# Altium PCB STM_System_Board.PCBDOC (part 6 of 16)
Units mm, origin at the board's own origin, x right, y up, seen from the top; angles counter-clockwise.
Board outline 222.53 x 100.01 mm, 6 copper layers (Top Layer, Int1 (GND), Int2 (Sign), Layer 1, Layer 2, Bottom Layer), stack 1.526 mm thick; 702 components, 774 nets, 3596 pads, 1988 vias.
Unrouted connection lines stored in the file: 1.
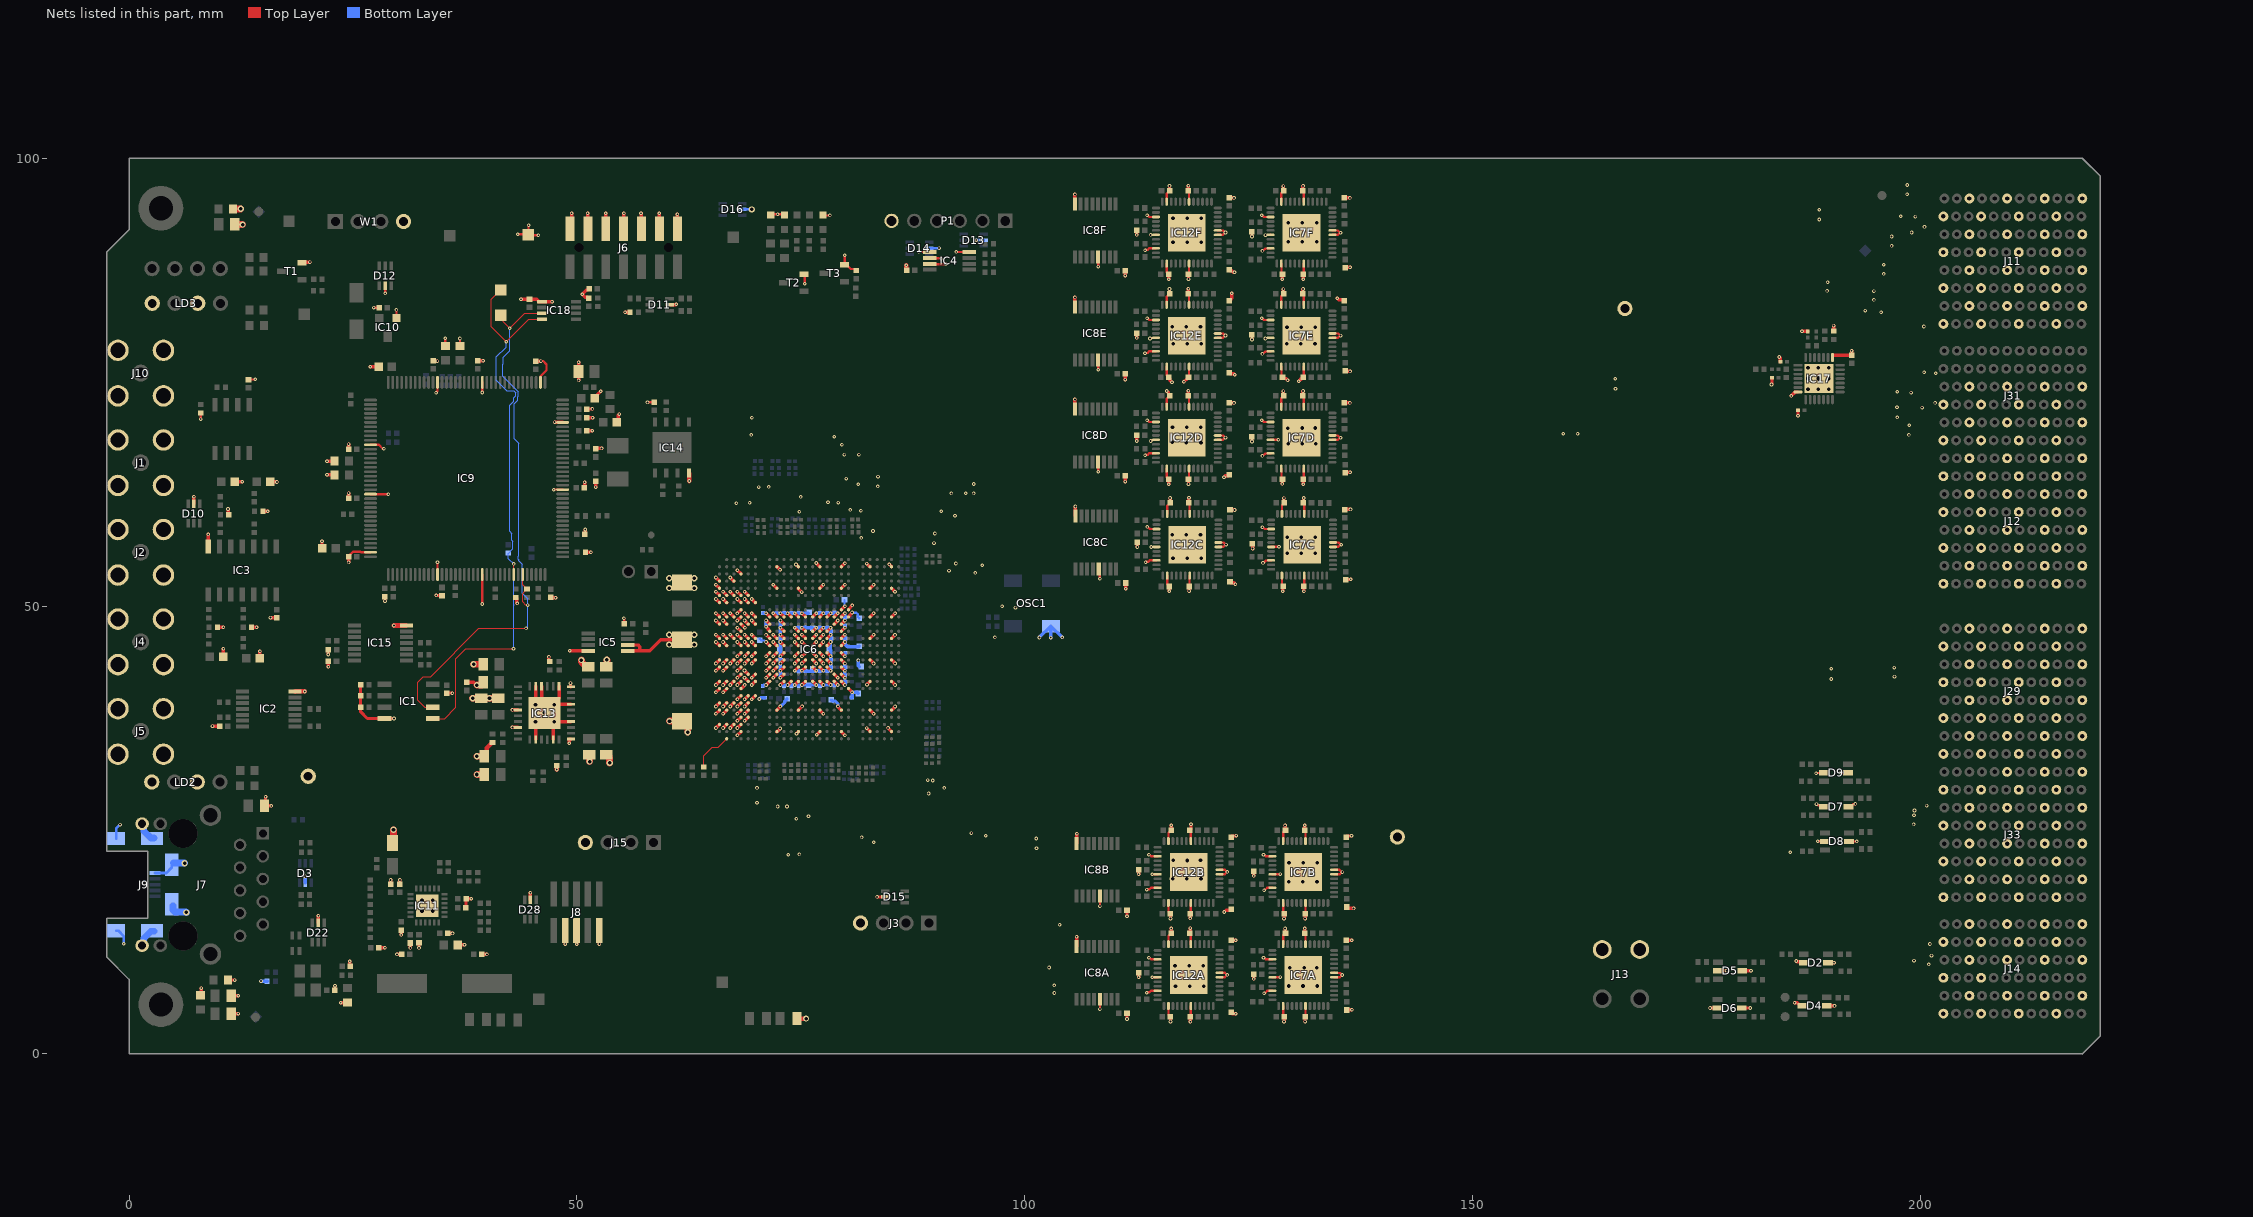
[diagram p9: the nets of this part, all layers, seen from the top]

## Via types
v1: diameter 0.4, hole 0.2, Top Layer to Bottom Layer, tented both sides, 1806 vias
v2: diameter 0.7, hole 0.4, Top Layer to Bottom Layer, tented both sides, 92 vias
v3: diameter 0.7, hole 0.4, Top Layer to Bottom Layer, 90 vias

## Nets (pads, with @x,y where several pads share a name; then routed paths per layer and width w, separated by ;. In a path a pad name is that pad's centre, name@x,y a point inside that pad or via, vN(x,y) a via of type N, cw(c..) or ccw(c..) an arc to the next point about the centre after c; other vN are vias at no path point) (continued)
GND: B2.1 B3.1 B4.1 C1.1 C2.1 C3.1 C4.1 C5.1 C6.1 C7.1 C8A.1 C8B.1 C8C.1 C8D.1 C8E.1 C8F.1 C9A.1 C9B.1 C9C.1 C9D.1 C9E.1 C9F.1 C10.2 C11.2 C12A.1 C12B.1 C12C.1 C12D.1 C12E.1 C12F.1 C13A.1 C13B.1 C13C.1 C13D.1 C13E.1 C13F.1 C14.1 C15.2 C16A.1 C16B.1 C16C.1 C16D.1 C16E.1 C16F.1 C17A.1 C17B.1 C17C.1 C17D.1 C17E.1 C17F.1 C18A.1 C18B.1 C18C.1 C18D.1 C18E.1 C18F.1 C19A.1 C19B.1 C19C.1 C19D.1 C19E.1 C19F.1 C20A.1 C20B.1 C20C.1 C20D.1 C20E.1 C20F.1 C21.1 C22.1 C23.1 C24.2 C25.2 C26.1 C27.1 C28.1 C29.1 C30.1 C31.2 C32.1 C33.1 C34.1 C35.2 C36.1 C37.2 C38.2 C39.1 C40.1 C41.2 C42.1 C43.2 C44.1 C45.1 C46.1 C47.1 C48.1 C49.1 C50.1 C51.1 C52.2 C53.1 C54.1 C55.1 C56.1 C57.2 C58.1 C59.1 C60.1 C61.1 C62.1 C63.1 C64.1 C65.1 C66.1 C67.2 C68.1 C69.1 C70.2 C71.2 C72.2 C73.2 C74.2 C75.1 C76.1 C77.1 C78.1 C79.2 C80.1 C81.1 C82.1 C83.1 C84.1 C85.1 C86.1 C87.1 C88.1 C89.2 C90.1 C91.1 C92.1 C93.1 C94.1 C95.1 C96.1 C97.1 C98.1 C99.1 C100.1 C101.2 C102.2 C103.2 C104.1 C105.1 C106.2 C107.1 C108.1 C109.1 C110.1 C111.1 C112.1 C113.1 C114.1 C115.1 C116.1 C117.1 C118.1 C119.1 C120.1 C121.1 C122.1 C123.1 C124.1 C125.1 C126.1 C127.1 C130.1 C131.1 C132.1 C133.1 C134.1 C135A.1 C135B.1 C135C.1 C135D.1 C135E.1 C135F.1 C136A.1 C136B.1 C136C.1 C136D.1 C136E.1 C136F.1 C137A.1 C137B.1 C137C.1 C137D.1 C137E.1 C137F.1 C138A.1 C138B.1 C138C.1 C138D.1 C138E.1 C138F.1 C139A.1 C139B.1 C139C.1 C139D.1 C139E.1 C139F.1 C140A.1 C140B.1 C140C.1 C140D.1 C140E.1 C140F.1 C141.1 C142.1 C143.1 D2.2 D2.5 D3.2 D4.2 D4.5 D5.2 D5.5 D6.2 D6.5 D7.2 D7.5 D8.2 D8.5 D9.2 D9.5 D10.2 D11.2 D12.2 D13.2 D14.2 D15.2 D16.2 D22.2 D28.2 IC1.4 IC2.7 IC3.7 IC4.4 IC4.5 IC4.6 IC4.7 IC5.4 IC5.5 IC5.6 IC6.AA7 IC6.AA9 IC6.AA10 IC6.AA12 IC6.AA13 IC6.AA14 IC6.AA15 IC6.AA17 IC6.AA18 IC6.AA20 IC6.AB6 IC6.AB7 IC6.AB9 IC6.AB10 IC6.AB12 IC6.AB13 IC6.AB14 IC6.AB15 IC6.AB17 IC6.AB18 IC6.AB20 IC6.AB21 IC6.AB22 IC6.AB23 IC6.AC3 IC6.AC6 IC6.AC7 IC6.AC8 IC6.AC9 IC6.AC10 IC6.AC11 IC6.AC12 IC6.AC13 IC6.AC14 IC6.AC15 IC6.AC16 IC6.AC17 IC6.AC18 IC6.AC19 IC6.AC20 IC6.AC21 IC6.AC22 IC6.AC23 IC6.AC24 IC6.AC25 IC6.AD4 IC6.AD6 IC6.AD9 IC6.AD12 IC6.AD15 IC6.AD18 IC6.AD21 IC6.AD24 IC6.AE6 IC6.AE7 IC6.AE9 IC6.AE10 IC6.AE12 IC6.AE13 IC6.AE15 IC6.AE16 IC6.AE18 IC6.AE19 IC6.AE21 IC6.AE22 IC6.AE24 IC6.AF4 IC6.AF5 IC6.AF6 IC6.AF7 IC6.AF9 IC6.AF10 IC6.AF12 IC6.AF13 IC6.AF15 IC6.AF16 IC6.AF18 IC6.AF19 IC6.AF21 IC6.AF22 IC6.AF24 IC6.B2 IC6.B5 IC6.B9 IC6.B12 IC6.B15 IC6.B18 IC6.B22 IC6.B25 IC6.E2 IC6.E5 IC6.E9 IC6.E12 IC6.E15 IC6.E18 IC6.E22 IC6.E25 IC6.H8 IC6.H9 IC6.H19 IC6.J2 IC6.J5 IC6.J8 IC6.J9 IC6.J10 IC6.J11 IC6.J12 IC6.J13 IC6.J14 IC6.J15 IC6.J16 IC6.J17 IC6.J18 IC6.J22 IC6.J25 IC6.K9 IC6.K10 IC6.K17 IC6.K18 IC6.L9 IC6.L11 IC6.L12 IC6.L13 IC6.L14 IC6.L15 IC6.L16 IC6.L18 IC6.M2 IC6.M5 IC6.M9 IC6.M11 IC6.M12 IC6.M13 IC6.M14 IC6.M15 IC6.M16 IC6.M18 IC6.M22 IC6.M25 IC6.N9 IC6.N11 IC6.N12 IC6.N13 IC6.N14 IC6.N15 IC6.N16 IC6.N18 IC6.P9 IC6.P11 IC6.P12 IC6.P13 IC6.P14 IC6.P15 IC6.P16 IC6.P18 IC6.R2 IC6.R5 IC6.R9 IC6.R11 IC6.R12 IC6.R13 IC6.R14 IC6.R15 IC6.R16 IC6.R18 IC6.R22 IC6.R25 IC6.T9 IC6.T18 IC6.U9 IC6.U10 IC6.U11 IC6.U12 IC6.U13 IC6.U14 IC6.U15 IC6.U16 IC6.U17 IC6.U18 IC6.V2 IC6.V5 IC6.V9 IC6.V12 IC6.V13 IC6.V14 IC6.V15 IC6.V16 IC6.V17 IC6.V22 IC6.V25 IC6.W9 IC6.W10 IC6.W11 IC6.W12 IC6.W13 IC6.W14 IC6.W15 IC6.W16 IC6.W17 IC6.W18 IC7A.6 IC7A.7 IC7A.18 IC7A.23 IC7A.27 IC7A.31 IC7A.34 IC7A.38 IC7A.43 IC7A.49 IC7B.6 IC7B.7 IC7B.18 IC7B.23 IC7B.27 IC7B.31 IC7B.34 IC7B.38 IC7B.43 IC7B.49 IC7C.6 IC7C.7 IC7C.18 IC7C.23 IC7C.27 IC7C.31 IC7C.34 IC7C.38 IC7C.43 IC7C.49 IC7D.6 IC7D.7 IC7D.18 IC7D.23 IC7D.27 IC7D.31 IC7D.34 IC7D.38 IC7D.43 IC7D.49 IC7E.6 IC7E.7 IC7E.18 IC7E.23 IC7E.27 IC7E.31 IC7E.34 IC7E.38 IC7E.43 IC7E.49 IC7F.6 IC7F.7 IC7F.18 IC7F.23 IC7F.27 IC7F.31 IC7F.34 IC7F.38 IC7F.43 IC7F.49 IC8A.8 IC8A.13 IC8B.8 IC8B.13 IC8C.8 IC8C.13 IC8D.8 IC8D.13 IC8E.8 IC8E.13 IC8F.8 IC8F.13 IC9.16 IC9.31 IC9.38 IC9.51 IC9.61 IC9.83 IC9.94 IC9.107 IC9.120 IC9.130 IC10.1 IC11.25 IC12A.6 IC12A.7 IC12A.18 IC12A.23 IC12A.27 IC12A.31 IC12A.34 IC12A.38 IC12A.43 IC12A.49 IC12B.6 IC12B.7 IC12B.18 IC12B.23 IC12B.27 IC12B.31 IC12B.34 IC12B.38 IC12B.43 IC12B.49 IC12C.6 IC12C.7 IC12C.18 IC12C.23 IC12C.27 IC12C.31 IC12C.34 IC12C.38 IC12C.43 IC12C.49 IC12D.6 IC12D.7 IC12D.18 IC12D.23 IC12D.27 IC12D.31 IC12D.34 IC12D.38 IC12D.43 IC12D.49 IC12E.6 IC12E.7 IC12E.18 IC12E.23 IC12E.27 IC12E.31 IC12E.34 IC12E.38 IC12E.43 IC12E.49 IC12F.6 IC12F.7 IC12F.18 IC12F.23 IC12F.27 IC12F.31 IC12F.34 IC12F.38 IC12F.43 IC12F.49 IC13.2 IC13.5 IC13.7 IC13.10 IC13.13 IC13.16 IC13.17 IC13.20 IC13.21 IC13.27 IC13.30 IC13.33 IC14.4 IC15.7 IC17.1 IC17.14 IC17.29 IC18.1 J1.2 J2.2 J3.4 J4.2 J5.2 J6.1 J6.3 J6.5 J6.7 J6.9 J6.11 J6.13 J7.L2 J7.L4 J8.3 J8.5 J8.9 J9.5 J9.6 J9.7 J9.8 J9.9 J9.10 J9.11 J10.2 J11.A2 J11.A4 J11.A6 J11.A8 J11.C1 J11.C3 J11.C5 J11.C7 J11.D2 J11.D4 J11.D6 J11.D8 J11.F1 J11.F3 J11.F5 J11.F7 J11.G2 J11.G4 J11.G6 J11.G8 J11.I1 J11.I3 J11.I5 J11.I7 J11.J2 J11.J4 J11.J6 J11.J8 J11.L1 J11.L3 J11.L5 J11.L7 J12.A2 J12.A4 J12.A6 J12.A8 J12.C1 J12.C3 J12.C5 J12.C7 J12.D2 J12.D4 J12.D6 J12.D8 J12.F1 J12.F3 J12.F5 J12.F7 J12.G2 J12.G4 J12.G6 J12.G8 J12.I1 J12.I3 J12.I5 J12.I7 J12.J2 J12.J4 J12.J6 J12.J8 J12.L1 J12.L3 J12.L5 J12.L7 J13.1 J13.2 J14.A2 J14.A4 J14.A6 J14.C1 J14.C5 J14.D2 J14.D4 J14.D6 J14.F1 J14.F5 J14.G2 J14.G4 J14.G6 J14.I1 J14.I3 J14.I5 J14.J2 J14.J4 J14.J6 J14.L1 J14.L3 J14.L5 J15.4 J29.A2 J29.A4 J29.A6 J29.A8 J29.C1 J29.C3 J29.C5 J29.C7 J29.D2 J29.D4 J29.D6 J29.D8 J29.F1 J29.F3 J29.F5 J29.F7 J29.G2 J29.G4 J29.G6 J29.G8 J29.I1 J29.I3 J29.I5 J29.I7 J29.J2 J29.J4 J29.J6 J29.J8 J29.L1 J29.L3 J29.L5 J29.L7 J31.A2 J31.A4 J31.C1 J31.C3 J31.D2 J31.D4 J31.F1 J31.F3 J31.G2 J31.G4 J31.I1 J31.I3 J31.J2 J31.J4 J31.L1 J31.L3 J33.A2 J33.A4 J33.A6 J33.A8 J33.C1 J33.C3 J33.C5 J33.C7 J33.D2 J33.D4 J33.D6 J33.D8 J33.F1 J33.F3 J33.F5 J33.F7 J33.G2 J33.G4 J33.G6 J33.G8 J33.I1 J33.I3 J33.I5 J33.I7 J33.J2 J33.J4 J33.J6 J33.L1 J33.L3 J33.L5 J33.L7 LD2.1 LD2.3 LD3.1 LD3.3 LD4.1 LD5.1 LD8.1 OSC1.2 P1.6 R3.1 R4.1 R10.2 R20.2 R30.1 R47.2 R49.2 R55.2 R73.2 R96.2 R135.1 R180.2 R181.2 R182.2 R183.2 R198.1 R200.2 R203.2 R214.1 R227.2 R228.2 R231.2 R233.2 R235.2 R238.1 R244.1 R284.1 R285.1 R286.1 R288.2 T1.2 T2.2 T3.2 TP7.1 W1.4 | length 567.3
  Top Layer w0.127: IC6.H9@80.315,48.784 IC6.H9@80.315,48.83 ; v1@80.715,49.23 v1(80.715,49.275)
  Top Layer w0.254: R238.1@7.994,71.545 7.997,71.542 7.997,70.87 v1(8.001,70.866) ; C46.1@13.335,75.253 13.364,75.282 14.068,75.282 v1(14.097,75.311) ; C57.2@24.51,55.496 24.51,55.576 24.994,56.06 25.825,56.06 25.889,55.996 IC9.107@26.96,55.996 ; IC9.94@26.96,62.496 26.973,62.484 v1(28.956,62.484) ; IC9.83@26.96,67.996 27.889,67.996 28.321,67.564 v1(28.448,67.564) ; v1(27.305,83.312) 27.316,83.301 27.932,83.301 C67.2@27.942,83.291 ; IC10.1@29.842,82.143 29.845,82.146 v1(29.845,83.058) ; v1(34.275,73.8) 34.275,73.84 34.435,74 IC9.61@34.435,74.971 ; IC9.120@34.435,53.521 v1(34.435,54.882) ; R181.2@35.306,79.032 v1(35.306,79.883) ; R180.2@36.935,79.032 v1(36.935,79.861) ; v1(39.435,50.227) IC9.130@39.435,53.521 ; v1(39.435,73.835) IC9.51@39.435,74.971 ; v1(43.4,91.5) 44.517,91.5 TP7.1@44.577,91.44 ; v1(44.6,92.5) 44.6,91.463 TP7.1@44.577,91.44 ; v1(45.7,91.4) 44.617,91.4 TP7.1@44.577,91.44 ; IC9.38@45.935,74.971 45.935,75.653 46.609,76.327 46.609,76.962 46.228,77.343 v1(45.974,77.343) ; v1(47.4,62.975) 47.421,62.996 IC9.16@48.41,62.996 ; v1(55.245,48.641) 55.273,48.613 55.273,48.036 C40.1@55.303,48.006 ; v1(57.875,72.725) 57.9,72.75 C45.1@58.65,72.75 ; LD5.1@71.628,93.662 71.692,93.726 v1(72.39,93.726) 73.088,93.726 LD8.1@73.152,93.662 ; T2.2@75.325,87.056 75.438,86.943 v1(75.438,85.979) ; LD4.1@77.47,93.662 77.533,93.599 v1(78.232,93.599) ; v1(79.883,89.154) 79.883,88.111 T3.2@79.88,88.108 80.08,88.108 80.56,87.628 80.99,87.628 R214.1@81.153,87.465 ; v1(88.138,89.535) 88.159,89.514 89.346,89.514 IC4.5@89.367,89.494 ; IC4.7@89.367,88.194 89.419,88.142 91.153,88.142 v1(91.186,88.175) ; IC4.6@89.367,88.844 89.403,88.808 90.643,88.808 v1(90.678,88.773) ; v1(92.331,89.533) 92.35,89.514 93.747,89.514 IC4.4@93.767,89.494 ; v1(108.179,65) IC8D.13@108.179,66.094 ; v1(108.179,76.385) IC8E.13@108.179,77.479 ; v1(108.179,87.893) IC8F.13@108.179,88.979 ; IC8C.13@108.244,54.146 108.342,54.048 108.342,53.125 108.375,53.092 v1(108.375,53.052) ; v1(108.375,5.012) IC8A.13@108.375,6.106 ; v1(108.375,16.501) IC8B.13@108.375,17.606 ; v1(113.412,78.212) 113.44,78.24 113.683,78.24 113.873,78.429 IC12E.34@114.629,78.429 ; v1(113.414,66.829) 113.461,66.876 113.705,66.876 113.873,67.044 IC12D.34@114.629,67.044 ; v1(113.414,89.714) 113.461,89.761 113.705,89.761 113.873,89.929 IC12F.34@114.629,89.929 ; v1(113.479,54.881) 113.526,54.928 113.77,54.928 113.938,55.096 IC12C.34@114.694,55.096 ; v1(113.61,6.841) 113.657,6.888 113.901,6.888 114.069,7.056 IC12A.34@114.825,7.056 ; v1(113.61,18.341) 113.657,18.388 113.901,18.388 114.069,18.556 IC12B.34@114.825,18.556 ; v1(113.644,70.732) 113.711,70.732 113.898,70.544 IC12D.27@114.629,70.544 ; v1(113.644,82.117) 113.711,82.117 113.898,81.929 IC12E.27@114.629,81.929 ; v1(113.644,93.617) 113.711,93.617 113.898,93.429 IC12F.27@114.629,93.429 ; v1(113.656,58.836) 113.696,58.836 113.872,58.66 113.899,58.66 113.963,58.596 IC12C.27@114.694,58.596 ; v1(113.84,10.744) 113.907,10.744 114.094,10.556 IC12A.27@114.825,10.556 ; v1(113.84,22.244) 113.907,22.244 114.094,22.056 IC12B.27@114.825,22.056 ; v1(113.969,79.865) 114.008,79.865 114.064,79.921 114.62,79.921 IC12E.31@114.629,79.929 ; v1(114.03,68.425) 114.069,68.425 114.18,68.536 114.62,68.536 IC12D.31@114.629,68.544 ; v1(114.03,91.425) 114.032,91.427 114.627,91.427 IC12F.31@114.629,91.429 ; v1(114.095,56.592) 114.097,56.594 114.692,56.594 IC12C.31@114.694,56.596 ; v1(114.226,8.552) 114.228,8.554 114.823,8.554 IC12A.31@114.825,8.556 ; v1(114.226,20.052) 114.228,20.054 114.823,20.054 IC12B.31@114.825,20.056 ; IC12D.38@115.829,65.344 115.829,64.354 C135D.1@116.054,64.129 ; IC12D.23@115.829,72.244 115.829,73.154 116.14,73.464 C20D.1@116.144,73.464 ; IC12E.38@115.829,76.729 115.829,75.738 C135E.1@116.054,75.513 ; IC12E.23@115.829,83.629 115.829,84.539 116.14,84.849 C20E.1@116.144,84.849 ; IC12F.38@115.829,88.229 115.829,87.238 C135F.1@116.054,87.013 ; IC12F.23@115.829,95.129 115.829,96.039 116.14,96.349 C20F.1@116.144,96.349 ; IC12C.38@115.894,53.396 115.894,52.405 C135C.1@116.119,52.18 ; IC12C.23@115.894,60.296 115.894,61.206 116.204,61.516 C20C.1@116.209,61.516 ; IC12A.38@116.025,5.356 116.025,4.366 C135A.1@116.25,4.141 ; IC12A.23@116.025,12.256 116.025,13.166 116.336,13.476 C20A.1@116.34,13.476 ; IC12B.38@116.025,16.856 116.025,15.866 C135B.1@116.25,15.641 ; IC12B.23@116.025,23.756 116.025,24.666 116.336,24.976 C20B.1@116.34,24.976 ; C19D.1@118.243,73.489 118.32,73.413 118.32,72.253 IC12D.18@118.329,72.244 ; C19E.1@118.243,84.874 118.32,84.798 118.32,83.638 IC12E.18@118.329,83.629 ; C19F.1@118.243,96.374 118.32,96.298 118.32,95.138 IC12F.18@118.329,95.129 ; C18D.1@118.263,64.129 118.32,64.186 118.32,65.336 IC12D.43@118.329,65.344 ; C18E.1@118.263,75.513 118.32,75.571 118.32,76.721 IC12E.43@118.329,76.729 ; C18F.1@118.263,87.013 118.32,87.071 118.32,88.221 IC12F.43@118.329,88.229 ; C19C.1@118.308,61.541 118.385,61.464 118.385,60.305 IC12C.18@118.394,60.296 ; C18C.1@118.328,52.18 118.385,52.238 118.385,53.388 IC12C.43@118.394,53.396 ; C19A.1@118.439,13.501 118.516,13.425 118.516,12.265 IC12A.18@118.525,12.256 ; C19B.1@118.439,25.001 118.516,24.925 118.516,23.765 IC12B.18@118.525,23.756 ; C18A.1@118.459,4.141 118.516,4.198 118.516,5.348 IC12A.43@118.525,5.356 ; C18B.1@118.459,15.641 118.516,15.698 118.516,16.848 IC12B.43@118.525,16.856 ; IC12D.6@121.529,68.544 121.538,68.553 122.106,68.553 v1@122.362,68.809 ; IC12D.7@121.529,69.044 122.11,69.044 122.352,68.802 v1(122.392,68.802) ; IC12E.6@121.529,79.929 121.538,79.938 122.106,79.938 122.362,80.194 v1(122.392,80.194) 122.342,80.194 122.106,80.429 IC12E.7@121.529,80.429 ; IC12F.6@121.529,91.429 121.538,91.438 122.106,91.438 122.362,91.694 v1(122.392,91.694) 122.342,91.694 122.106,91.929 IC12F.7@121.529,91.929 ; IC12C.6@121.594,56.596 121.603,56.605 122.171,56.605 122.427,56.861 v1(122.457,56.861) 122.407,56.861 122.171,57.096 IC12C.7@121.594,57.096 ; IC12A.6@121.725,8.556 121.734,8.565 122.302,8.565 122.558,8.821 v1(122.588,8.821) 122.538,8.821 122.302,9.056 IC12A.7@121.725,9.056 ; IC12B.6@121.725,20.056 121.734,20.065 122.302,20.065 122.558,20.321 v1(122.588,20.321) 122.538,20.321 122.302,20.556 IC12B.7@121.725,20.556 ; v1(126.444,70.732) 126.511,70.732 126.698,70.544 IC7D.27@127.429,70.544 ; v1(126.444,82.117) 126.511,82.117 126.698,81.929 IC7E.27@127.429,81.929 ; v1(126.444,93.631) 126.483,93.631 126.685,93.429 IC7F.27@127.429,93.429 ; v1(126.509,58.784) 126.576,58.784 126.763,58.596 IC7C.27@127.494,58.596 ; v1(126.511,66.756) 126.56,66.804 126.619,66.804 126.85,67.036 127.42,67.036 IC7D.34@127.429,67.044 ; v1(126.511,78.141) 126.56,78.189 126.619,78.189 126.85,78.421 127.42,78.421 IC7E.34@127.429,78.429 ; v1(126.511,89.641) 126.56,89.689 126.619,89.689 126.85,89.921 127.42,89.921 IC7F.34@127.429,89.929 ; v1(126.576,54.808) 126.625,54.856 126.684,54.856 126.915,55.088 127.485,55.088 IC7C.34@127.494,55.096 ; v1(126.64,10.744) 126.707,10.744 126.894,10.556 IC7A.27@127.625,10.556 ; v1(126.64,22.244) 126.707,22.244 126.894,22.056 IC7B.27@127.625,22.056 ; v1(126.708,6.768) 126.756,6.816 126.815,6.816 127.046,7.048 127.616,7.048 IC7A.34@127.625,7.056 ; v1(126.708,18.268) 126.756,18.316 126.815,18.316 127.046,18.548 127.616,18.548 IC7B.34@127.625,18.556 ; v1(126.848,79.863) 126.888,79.863 126.945,79.921 127.42,79.921 IC7E.31@127.429,79.929 ; v1(126.86,91.407) 126.873,91.421 127.42,91.421 IC7F.31@127.429,91.429 ; IC7D.31@127.429,68.544 127.438,68.553 128.295,68.553 v1(128.305,68.564) ; IC7C.31@127.494,56.596 127.503,56.605 128.36,56.605 v1(128.37,56.616) ; IC7A.31@127.625,8.556 127.634,8.565 128.491,8.565 v1(128.501,8.576) ; IC7B.31@127.625,20.056 127.634,20.065 128.491,20.065 v1(128.501,20.076) ; IC7D.38@128.629,65.344 128.638,65.336 128.638,64.25 C140D.1@128.754,64.134 ; IC7D.23@128.629,72.244 128.629,73.204 128.854,73.429 C9D.1@128.854,73.452 ; IC7E.38@128.629,76.729 128.638,76.721 128.638,75.635 C140E.1@128.754,75.519 ; IC7E.23@128.629,83.629 128.629,84.589 128.854,84.814 C9E.1@128.854,84.837 ; IC7F.38@128.629,88.229 128.638,88.221 128.638,87.135 C140F.1@128.754,87.019 ; IC7F.23@128.629,95.129 128.629,96.089 128.854,96.314 C9F.1@128.854,96.337 ; IC7C.38@128.694,53.396 128.703,53.388 128.703,52.302 C140C.1@128.819,52.186 ; IC7C.23@128.694,60.296 128.694,61.256 128.919,61.481 C9C.1@128.919,61.504 ; IC7A.38@128.825,5.356 128.834,5.348 128.834,4.262 C140A.1@128.95,4.146 ; IC7A.23@128.825,12.256 128.825,13.216 129.05,13.441 C9A.1@129.05,13.464 ; IC7B.38@128.825,16.856 128.834,16.848 128.834,15.762 C140B.1@128.95,15.646 ; IC7B.23@128.825,23.756 128.825,24.716 129.05,24.941 C9B.1@129.05,24.964 ; C12D.1@131.04,73.464 131.12,73.384 131.12,72.253 IC7D.18@131.129,72.244 ; C12E.1@131.04,84.849 131.12,84.769 131.12,83.638 IC7E.18@131.129,83.629 ; C12F.1@131.04,96.349 131.12,96.269 131.12,95.138 IC7F.18@131.129,95.129 ; C13D.1@131.077,64.143 131.12,64.187 131.12,65.336 IC7D.43@131.129,65.344 ; C13E.1@131.077,75.528 131.12,75.572 131.12,76.721 IC7E.43@131.129,76.729 ; C13F.1@131.077,87.028 131.12,87.072 131.12,88.221 IC7F.43@131.129,88.229 ; C12C.1@131.105,61.516 131.185,61.436 131.185,60.305 IC7C.18@131.194,60.296 ; C13C.1@131.142,52.195 131.185,52.239 131.185,53.388 IC7C.43@131.194,53.396 ; C12A.1@131.236,13.476 131.316,13.396 131.316,12.265 IC7A.18@131.325,12.256 ; C12B.1@131.236,24.976 131.316,24.896 131.316,23.765 IC7B.18@131.325,23.756 ; C13A.1@131.273,4.155 131.316,4.199 131.316,5.348 IC7A.43@131.325,5.356 ; C13B.1@131.273,15.655 131.316,15.699 131.316,16.848 IC7B.43@131.325,16.856 ; IC7D.6@134.329,68.544 134.338,68.553 134.942,68.553 v1@135.178,68.79 ; IC7D.7@134.329,69.044 134.338,69.036 134.933,69.036 v1@135.178,68.79 ; IC7E.6@134.329,79.929 134.338,79.938 134.942,79.938 v1@135.178,80.175 ; IC7E.7@134.329,80.429 134.338,80.421 134.969,80.421 135.205,80.185 v1(135.245,80.185) ; IC7F.6@134.329,91.429 134.338,91.438 134.942,91.438 v1@135.178,91.675 ; IC7F.7@134.329,91.929 134.338,91.921 134.933,91.921 v1@135.178,91.675 ; IC7C.6@134.394,56.596 134.403,56.605 135.007,56.605 v1@135.243,56.842 ; IC7C.7@134.394,57.096 134.403,57.088 134.998,57.088 v1@135.243,56.842 ; IC7A.6@134.525,8.556 134.534,8.565 135.138,8.565 v1@135.374,8.802 ; IC7A.7@134.525,9.056 134.534,9.048 135.161,9.048 135.392,8.817 v1(135.432,8.817) ; IC7B.6@134.525,20.056 134.534,20.065 135.138,20.065 v1@135.374,20.302 ; IC7B.7@134.525,20.556 134.534,20.548 135.129,20.548 v1@135.374,20.302 ; v1(135.245,68.79) v1@135.178,68.79 ; v1(135.245,91.675) v1@135.178,91.675 ; v1(135.31,56.842) v1@135.243,56.842 ; v1(135.441,20.302) v1@135.374,20.302 ; v1(188.316,31.344) 188.334,31.362 189.18,31.362 D9.2@189.199,31.381 ; v1(188.366,27.889) 188.406,27.889 188.542,27.753 189.046,27.753 D7.5@189.219,27.58 ; v1(188.493,23.749) 188.508,23.734 189.283,23.734 D8.2@189.298,23.72 ; v1(191.008,31.394) 191.015,31.388 191.892,31.388 D9.5@191.899,31.381 ; D7.2@191.919,27.58 192.169,27.58 192.475,27.887 192.682,27.887 v1(192.71,27.915) ; D8.5@191.998,23.72 D8.5@191.998,23.72 192.86,23.722 v1(192.862,23.724)
  Top Layer w0.3: v1(28.6,84.9) D12.2@28.6,85.775 ; v1(83.5,17.525) D15.2@84.4,17.525
  Top Layer w0.35: R286.1@25.855,41.225 R285.1@25.855,39.962 R284.1@25.855,38.7 25.855,38.195 26.605,37.445 IC1.4@28.5,37.445 v1(29.58,37.445) ; C1.1@35.45,40.275 v1(36.1,40.275)
  Top Layer w0.381: D10.2@7.239,61.425 v1(7.239,62.192) ; R4.1@8,6.55 8.05,6.6 v1(8.05,7.35) ; IC3.7@8.831,56.666 v1(8.831,57.996) ; v1(9.316,36.601) C5.1@10.124,36.601 ; R200.2@9.868,47.625 v1(10.529,47.625) ; C3.1@10.529,44.323 v1(10.529,45.226) ; v1(11.049,60.833) 11.053,60.829 11.053,60.283 R10.2@11.138,60.198 ; R135.1@11.05,8.25 v1(11.806,8.25) ; C11.2@11.4,4.5 v1(12.196,4.5) ; C103.2@11.4,6.491 v1(12.196,6.491) ; C2.1@11.799,63.881 v1(12.641,63.881) ; R203.2@13.678,47.625 v1(14.236,47.625) ; C4.1@14.593,44.196 14.601,44.204 14.601,44.954 v1(14.605,44.958) ; R20.2@14.948,60.579 v1(15.494,60.579) ; v1(15.24,28.702) 15.236,28.698 15.236,27.798 C102.2@15.124,27.686 v1(15.875,27.686) ; C7.1@15.736,63.881 15.767,63.85 16.506,63.85 v1(16.51,63.846) ; v1(15.79,48.705) 15.793,48.702 16.507,48.702 C6.1@16.51,48.699 ; T1.2@19.311,88.326 19.373,88.388 20.189,88.388 v1(20.193,88.392) ; D22.2@21.122,14.645 21.129,14.652 21.129,15.414 v1(21.133,15.418) ; v1(21.539,57.226) 21.543,57.223 21.543,56.485 C24.2@21.574,56.453 ; v1(22.098,64.643) R183.2@22.949,64.643 ; v1(22.098,66.167) R182.2@22.949,66.167 ; v1(22.239,44.591) R228.2@22.239,45.114 ; v1(22.259,43.214) C44.1@22.259,43.844 ; C108.1@22.987,7.112 v1(22.987,7.62) ; v1(23.622,5.715) 23.626,5.719 24.353,5.719 R73.2@24.384,5.75 ; v1(24.511,54.864) C57.2@24.51,55.496 ; C74.2@24.51,62.044 v1(24.511,62.611) ; C73.2@24.51,67.497 v1(24.511,68.072) ; v1(24.643,10.343) 24.647,10.339 24.647,9.839 C109.1@24.707,9.779 ; v1(26.924,76.708) 26.928,76.704 27.843,76.704 C25.2@27.851,76.696 ; C80.1@27.859,11.865 v1(28.566,11.865) ; R30.1@28.551,51.035 28.571,51.015 28.571,50.55 v1(28.575,50.546) ; C79.2@29.197,18.951 v1(29.197,19.426) ; v1(29.909,11.115) C82.1@30.459,11.115 ; C85.1@30.233,18.951 v1(30.233,19.426) ; v1(30.384,13.287) R49.2@30.384,13.814 ; C88.1@31.383,12.387 31.405,12.365 31.405,11.841 v1(31.409,11.837) ; C81.1@32.366,12.391 32.365,12.39 v1(32.364,11.836) ; C35.2@33.935,77.395 33.983,77.347 34.413,77.347 v1(34.417,77.343) ; v1(34.29,51.181) 34.294,51.177 34.925,51.177 C70.2@34.933,51.169 ; C83.1@35.595,13.472 35.605,13.461 36.101,13.461 v1(36.105,13.457) ; C87.1@36.709,12.161 36.73,12.182 37.444,12.182 v1(37.447,12.186) ; C84.1@37.599,16.311 37.615,16.327 37.615,17.298 R47.2@37.632,17.314 v1(38.193,17.314) ; C39.1@37.719,41.471 38.466,41.471 38.764,41.173 v2(38.837,41.173) ; C37.2@38.916,77.375 v1(39.525,77.375) ; C91.1@39.359,11.115 v1(39.953,11.115) ; v1(42.79,36.449) IC13.30@43.409,36.45 ; v1(42.79,38.407) 42.793,38.404 43.405,38.404 IC13.27@43.409,38.4 ; R96.2@43.174,50.949 43.194,50.949 43.293,50.85 43.293,50.329 43.326,50.297 v1(43.326,50.292) ; v1(43.75,84.25) C143.1@44.7,84.25 45.517,84.25 45.741,84.027 45.741,83.984 45.75,83.975 IC18.1@46.1,83.975 v1(47.225,83.975) ; D28.2@44.8,17.21 v1(44.8,18.003) ; IC13.2@45.389,35.112 45.389,37.092 IC13.33@46.372,38.075 ; IC13.21@45.389,41.037 45.389,39.058 IC13.33@46.047,38.4 ; C71.2@45.406,77.344 v1(45.974,77.343) ; IC13.20@46.047,41.037 IC13.33@46.047,38.4 ; v1(46.863,44.323) 46.867,44.319 46.867,43.877 R233.2@46.946,43.798 ; C72.2@47.05,50.964 47.083,50.931 47.612,50.931 v1(47.616,50.927) ; IC13.5@47.355,35.112 47.355,37.092 IC13.33@47.347,37.1 ; v1(47.507,70.526) 47.511,70.523 48.384,70.523 IC9.31@48.41,70.496 ; IC13.17@48.005,41.037 48.005,39.708 IC13.33@47.347,39.05 ; v1(48.695,12.265) J8.3@48.695,13.854 ; v1(49.149,34.671) 49.153,34.675 49.153,35.109 49.193,35.15 IC13.7@49.334,35.15 ; v1(49.197,44.999) IC5.4@51.267,44.999 ; J6.13@49.213,92.132 49.399,92.319 49.399,93.849 v1(49.403,93.853) ; v1(49.276,41.402) 49.28,41.398 49.28,41.04 49.32,41 IC13.16@49.334,41 ; IC13.10@49.334,37.1 IC13.33@47.347,37.1 ; IC13.13@49.334,39.05 IC13.33@47.347,39.05 ; v1(49.965,12.246) J8.5@49.965,13.854 ; v1(50.184,75.184) 50.18,75.188 50.18,76.174 C78.1@50.154,76.2 50.18,76.226 50.18,77.212 v1(50.184,77.216) ; C38.2@50.825,63.2 50.846,63.221 50.846,63.821 v1(50.85,63.825) ; C43.2@50.885,57.996 50.923,58.034 50.923,58.543 v1(50.927,58.547) ; R198.1@50.952,56.002 50.954,56.005 51.56,56.005 v1(51.562,56.007) ; C41.2@51.075,69.575 v1(51.7,69.575) ; C31.2@51.075,71 51.09,71.015 51.735,71.015 51.745,71.025 v1(51.75,71.025) ; C15.2@51.075,71.95 51.115,71.99 51.71,71.99 51.72,72 v1(51.725,72) ; v1(51.181,93.853) 51.185,93.849 51.185,92.161 J6.11@51.213,92.132 ; C142.1@51.3,84.35 51.18,84.469 50.931,84.469 v1(50.6,84.8) 51.08,85.281 51.231,85.281 C141.1@51.35,85.4 ; C107.1@51.975,73.175 52.26,73.46 52.26,73.585 v1(52.65,73.975) ; C21.1@52.089,63.923 52.097,63.915 52.097,63.281 v1(52.101,63.277) ; C23.1@52.114,67.535 52.169,67.59 52.734,67.59 52.745,67.6 v1(52.75,67.6) ; v1(52.505,12.265) J8.9@52.505,13.854 ; J6.9@53.213,92.132 v1(53.213,93.853) ; C14.1@54.425,70.5 54.617,70.692 54.617,71.312 54.725,71.42 v1(54.725,71.425) ; J6.7@55.213,92.132 55.241,92.161 55.241,93.849 v1(55.245,93.853) ; v1(55.372,82.804) R227.2@55.918,82.804 ; IC5.5@55.667,44.999 57.023,44.999 ; IC5.6@55.667,45.649 56.84,45.649 57.023,45.466 57.023,44.999 ; v1(57.15,93.853) 57.154,93.849 57.154,92.192 J6.5@57.213,92.132 ; v1(59.182,93.853) 59.186,93.849 59.186,92.16 J6.3@59.213,92.132 ; D11.2@60.329,83.632 60.339,83.641 61.03,83.641 61.082,83.693 v1(61.087,83.693) ; J6.1@61.213,92.132 v1(61.214,93.726) ; C106.2@61.715,46.234 59.366,46.234 58.131,44.999 57.023,44.999 ; v1(65.515,36.384) IC6.AF24@65.915,36.784 ; v1(65.515,37.984) IC6.AF22@65.915,38.384 ; v1(65.515,38.784) IC6.AF21@65.915,39.184 ; v1(65.515,40.384) IC6.AF19@65.915,40.784 ; v1(65.515,41.184) IC6.AF18@65.915,41.584 ; v1(65.515,42.784) IC6.AF16@65.915,43.184 ; v1(65.515,43.584) IC6.AF15@65.915,43.984 ; v1(65.515,45.984) IC6.AF13@65.915,45.584 ; v1(65.515,46.784) IC6.AF12@65.915,46.384 ; v1(65.515,48.384) IC6.AF10@65.915,47.984 ; v1(65.515,49.184) IC6.AF9@65.915,48.784 ; v1(65.515,50.784) IC6.AF7@65.915,50.384 ; v1(65.515,51.584) IC6.AF6@65.915,51.184 ; v1(65.515,52.384) IC6.AF5@65.915,51.984 ; v1(65.515,53.184) IC6.AF4@65.915,52.784 ; v1(66.315,36.384) IC6.AE24@66.715,36.784 ; v1(66.315,37.984) IC6.AE22@66.715,38.384 ; v1(66.315,38.784) IC6.AE21@66.715,39.184 ; v1(66.315,40.384) IC6.AE19@66.715,40.784 ; v1(66.315,41.184) IC6.AE18@66.715,41.584 ; v1(66.315,42.784) IC6.AE16@66.715,43.184 ; v1(66.315,43.584) IC6.AE15@66.715,43.984 ; v1(66.315,45.984) IC6.AE13@66.715,45.584 ; v1(66.315,46.784) IC6.AE12@66.715,46.384 ; v1(66.315,48.384) IC6.AE10@66.715,47.984 ; v1(66.315,49.184) IC6.AE9@66.715,48.784 ; v1(66.315,50.784) IC6.AE7@66.715,50.384 ; v1(66.315,51.584) IC6.AE6@66.715,51.184 ; v1(67.115,36.384) IC6.AD24@67.515,36.784 ; v1(67.115,38.784) IC6.AD21@67.515,39.184 ; v1(67.115,41.184) IC6.AD18@67.515,41.584 ; v1(67.115,43.584) IC6.AD15@67.515,43.984 ; v1(67.115,46.784) IC6.AD12@67.515,46.384 ; v1(67.115,49.184) IC6.AD9@67.515,48.784 ; v1(67.115,51.584) IC6.AD6@67.515,51.184 ; v1(67.115,53.184) IC6.AD4@67.515,52.784 ; v1(67.9,48.375) 67.905,48.375 v1@67.915,48.385 ; v1(67.9,49.175) 67.905,49.175 v1@67.915,49.184 ; v1(67.915,35.584) IC6.AC25@68.315,35.984 ; v1(67.915,36.384) IC6.AC24@68.315,36.784 ; v1(67.915,37.184) IC6.AC23@68.315,37.584 ; v1(67.915,37.984) IC6.AC22@68.315,38.384 ; v1(67.915,38.784) IC6.AC21@68.315,39.184 ; v1(67.915,39.584) IC6.AC20@68.315,39.984 ; v1(67.915,41.184) IC6.AC18@68.315,41.584 ; v1(67.915,41.984) IC6.AC17@68.315,42.384 ; v1(67.915,42.784) IC6.AC16@68.315,43.184 ; v1(67.915,43.584) IC6.AC15@68.315,43.984 ; v1(67.915,44.384) IC6.AC14@68.315,44.784 ; v1(67.915,45.984) IC6.AC13@68.315,45.584 ; v1(67.915,46.784) IC6.AC12@68.315,46.384 ; v1(67.915,47.584) IC6.AC11@68.315,47.184 ; v1(67.915,50.784) IC6.AC7@68.315,50.384 ; v1(67.915,51.584) IC6.AC6@68.315,51.184 ; v1(67.915,53.984) IC6.AC3@68.315,53.584 ; v1@67.915,48.385 IC6.AC9@68.315,48.784 ; v1@67.915,49.184 IC6.AC8@68.315,49.584 ; IC6.AC19@68.315,40.784 68.716,41.185 68.725,41.195 v1(68.725,41.2) ; IC6.AC10@68.315,47.984 68.72,47.579 68.746,47.579 v1(68.75,47.575) ; v1(68.7,42) IC6.AB18@69.115,41.584 ; v1(68.7,42.8) IC6.AB17@69.115,42.384 ; v1(68.715,37.184) IC6.AB23@69.115,37.584 ; v1(68.715,37.984) IC6.AB22@69.115,38.384 ; v1(68.715,38.784) IC6.AB21@69.115,39.184 ; v1(68.715,39.584) IC6.AB20@69.115,39.984 ; v1(68.715,43.584) IC6.AB15@69.115,43.984 ; v1(68.715,44.384) IC6.AB14@69.115,44.784 ; v1(68.715,45.984) IC6.AB13@69.115,45.584 ; v1(68.715,46.784) IC6.AB12@69.115,46.384 ; v1(68.715,48.384) IC6.AB10@69.115,47.984 ; v1(68.715,49.184) IC6.AB9@69.115,48.784 ; v1(68.715,50.784) IC6.AB7@69.115,50.384 ; v1(68.715,51.584) IC6.AB6@69.115,51.184 ; v1(69.515,39.584) IC6.AA20@69.915,39.984 ; v1(69.515,41.184) IC6.AA18@69.915,41.584 ; v1(69.515,41.984) IC6.AA17@69.915,42.384 ; v1(69.515,43.584) IC6.AA15@69.915,43.984 ; v1(69.515,44.384) IC6.AA14@69.915,44.784 ; v1(69.515,45.984) IC6.AA13@69.915,45.584 ; v1(69.515,46.784) IC6.AA12@69.915,46.384 ; v1(69.515,48.384) IC6.AA10@69.915,47.984 ; v1(69.515,49.184) IC6.AA9@69.915,48.784 ; v1(69.515,50.784) IC6.AA7@69.915,50.384 ; v1(71.115,41.184) IC6.W18@71.515,41.584 ; v1(71.115,41.984) IC6.W17@71.515,42.384 ; v1(71.115,42.784) IC6.W16@71.515,43.184 ; v1(71.115,43.584) IC6.W15@71.515,43.984 ; v1(71.115,44.384) IC6.W14@71.515,44.784 ; v1(71.115,45.984) IC6.W13@71.515,45.584 ; v1(71.115,46.78) 71.119,46.78 IC6.W12@71.515,46.384 ; v1(71.115,47.688) 71.115,47.683 71.339,47.459 71.339,47.36 IC6.W11@71.515,47.184 ; v1(71.115,48.384) IC6.W10@71.515,47.984 ; v1(71.115,49.184) IC6.W9@71.515,48.784 ; v1(71.915,41.984) IC6.V17@72.315,42.384 ; v1(71.915,42.784) IC6.V16@72.315,43.184 ; v1(71.915,43.584) IC6.V15@72.315,43.984 ; v1(71.915,44.384) IC6.V14@72.315,44.784 ; v1(71.915,45.984) IC6.V13@72.315,45.584 ; v1(71.915,46.784) IC6.V12@72.315,46.384 ; v1(71.915,49.184) IC6.V9@72.315,48.784 ; v1(71.915,52.384) IC6.V5@72.315,51.984 ; IC6.V25@72.315,35.984 72.329,35.984 72.67,36.325 v1(72.675,36.325) ; IC6.V22@72.315,38.384 72.696,38.765 72.696,38.796 v1(72.7,38.8) ; IC6.V2@72.315,54.384 72.344,54.355 72.37,54.355 v1(72.675,54.05) ; v1(72.715,41.184) IC6.U18@73.115,41.584 ; v1(72.715,41.984) IC6.U17@73.115,42.384 ; v1(72.715,42.784) IC6.U16@73.115,43.184 ; v1(72.715,43.584) IC6.U15@73.115,43.984 ; v1(72.715,44.384) IC6.U14@73.115,44.784 ; v1(72.715,45.984) IC6.U13@73.115,45.584 ; v1(72.715,46.784) IC6.U12@73.115,46.384 ; v1(72.715,47.584) IC6.U11@73.115,47.184 ; v1(72.715,48.384) IC6.U10@73.115,47.984 ; v1(72.715,49.184) IC6.U9@73.115,48.784 ; v1(73.515,41.184) IC6.T18@73.915,41.584 ; v1(73.515,49.184) IC6.T9@73.915,48.784 ; v1(74.315,41.184) IC6.R18@74.715,41.584 ; v1(74.315,42.784) IC6.R16@74.715,43.184 ; v1(74.315,43.584) IC6.R15@74.715,43.984 ; v1(74.315,44.384) IC6.R14@74.715,44.784 ; v1(74.315,45.984) IC6.R13@74.715,45.584 ; v1(74.315,46.784) IC6.R12@74.715,46.384 ; v1(74.315,47.584) IC6.R11@74.715,47.184 ; v1(74.315,49.184) IC6.R9@74.715,48.784 ; v1(74.451,54.637) 74.456,54.637 74.709,54.384 IC6.R2@74.715,54.384 ; v1(74.503,35.744) 74.715,35.956 IC6.R25@74.715,35.984 ; IC6.R22@74.715,38.384 74.715,38.39 v1(75.125,38.8) ; IC6.R5@74.715,51.984 74.715,51.94 75.1,51.555 v1(75.1,51.55) ; v1(75.115,41.184) IC6.P18@75.515,41.584 ; v1(75.115,42.784) IC6.P16@75.515,43.184 ; v1(75.115,43.584) IC6.P15@75.515,43.984 ; v1(75.115,44.384) IC6.P14@75.515,44.784 ; v1(75.115,45.984) IC6.P13@75.515,45.584 ; v1(75.115,46.784) IC6.P12@75.515,46.384 ; v1(75.115,47.584) IC6.P11@75.515,47.184 ; v1(75.115,49.184) IC6.P9@75.515,48.784 ; IC6.N18@76.315,41.584 v1(76.715,41.184) ; IC6.N16@76.315,43.184 v1(76.715,42.784) ; IC6.N15@76.315,43.984 v1(76.715,43.584) ; IC6.N14@76.315,44.784 v1(76.715,44.384) ; IC6.N13@76.315,45.584 v1(76.715,45.984) ; IC6.N12@76.315,46.384 v1(76.715,46.784) ; IC6.N11@76.315,47.184 v1(76.715,47.584) ; IC6.N9@76.315,48.784 v1(76.715,49.184) ; v1(76.7,54.8) IC6.M2@77.115,54.384 ; v1(76.766,35.625) 76.766,35.63 77.115,35.979 IC6.M25@77.115,35.984 ; IC6.M22@77.115,38.384 v1(77.515,37.984) ; IC6.M18@77.115,41.584 v1(77.515,41.184) ; IC6.M16@77.115,43.184 v1(77.515,42.784) ; IC6.M15@77.115,43.984 v1(77.515,43.584) ; IC6.M14@77.115,44.784 v1(77.515,44.384) ; IC6.M13@77.115,45.584 v1(77.515,45.984) ; IC6.M12@77.115,46.384 v1(77.515,46.784) ; IC6.M11@77.115,47.184 v1(77.515,47.584) ; IC6.M9@77.115,48.784 v1(77.515,49.184) ; IC6.M5@77.115,51.984 v1(77.515,52.384) ; IC6.L18@77.915,41.584 v1(78.315,41.184) ; IC6.L16@77.915,43.184 v1(78.315,42.784) ; IC6.L15@77.915,43.984 v1(78.315,43.584) ; IC6.L14@77.915,44.784 v1(78.315,44.384) ; IC6.L13@77.915,45.584 v1(78.315,45.984) ; IC6.L12@77.915,46.384 v1(78.315,46.784) ; IC6.L11@77.915,47.184 v1(78.315,47.584) ; IC6.L9@77.915,48.784 v1(78.315,49.184) ; IC6.K18@78.715,41.584 v1(79.115,41.184) ; IC6.K17@78.715,42.384 v1(79.115,41.984) ; IC6.K10@78.715,47.984 v1(79.115,48.384) ; IC6.K9@78.715,48.784 v1(79.115,49.184) ; v1(79.125,38.8) 79.129,38.796 79.129,38.77 IC6.J22@79.515,38.384 ; IC6.J25@79.515,35.984 v1(79.915,35.584) ; IC6.J18@79.515,41.584 v1(79.915,41.184) ; IC6.J17@79.515,42.384 v1(79.915,41.984) ; IC6.J16@79.515,43.184 v1(79.915,42.784) ; IC6.J15@79.515,43.984 v1(79.915,43.584) ; IC6.J14@79.515,44.784 v1(79.915,44.384) ; IC6.J13@79.515,45.584 v1(79.915,45.984) ; IC6.J12@79.515,46.384 v1(79.915,46.784) ; IC6.J11@79.515,47.184 v1(79.915,47.584) ; IC6.J10@79.515,47.984 v1(79.915,48.384) ; IC6.J9@79.515,48.784 v1(79.915,49.184) ; IC6.J8@79.515,49.584 v1(79.915,49.984) ; IC6.J5@79.515,51.984 v1(79.915,52.384) ; IC6.J2@79.515,54.384 v1(79.915,54.784) ; IC6.H19@80.315,40.784 v1(80.715,40.384) ; IC6.H9@80.315,48.83 v1@80.715,49.23 ; IC6.H8@80.315,49.584 80.315,49.66 80.725,50.07 v1(80.725,50.075) ; v1(82.35,36.375) 82.35,36.37 82.715,36.005 IC6.E25@82.715,35.984 ; v1(82.351,54.742) 82.356,54.742 IC6.E2@82.714,54.384 ; v1(82.375,41.225) 82.379,41.229 82.379,41.248 IC6.E18@82.715,41.584 ; IC6.E22@82.715,38.384 v1(83.115,37.984) ; IC6.E15@82.715,43.984 v1(83.115,43.584) ; IC6.E12@82.715,46.384 v1(83.115,46.784) ; IC6.E9@82.715,48.784 v1(83.115,49.184) ; IC6.E5@82.715,51.984 v1(83.115,52.384) ; v1(84.725,36.4) 84.729,36.396 84.729,36.37 IC6.B25@85.115,35.984 ; v1(84.857,54.642) IC6.B2@85.115,54.384 ; IC6.B22@85.115,38.384 v1(85.515,38.784) ; IC6.B18@85.115,41.584 v1(85.515,41.184) ; IC6.B15@85.115,43.984 v1(85.515,43.584) ; IC6.B12@85.115,46.385 85.5,46.77 v1(85.5,46.775) ; IC6.B9@85.115,48.784 v1(85.515,49.184) ; IC6.B5@85.115,51.984 v1(85.5,51.6) ; IC8D.8@105.579,71.994 v1(105.579,73.061) ; IC8E.8@105.579,83.379 v1(105.579,84.446) ; IC8F.8@105.579,94.879 v1(105.579,95.946) ; IC8C.8@105.644,60.046 v1(105.644,61.113) ; IC8A.8@105.775,12.006 v1(105.775,13.073) ; IC8B.8@105.775,23.506 105.798,23.53 105.798,24.581 v1(105.802,24.584) ; v1(111.204,63.888) C8D.1@111.204,64.519 ; v1(111.204,75.273) C8E.1@111.204,75.904 ; v1(111.204,86.89) C8F.1@111.204,87.404 ; v1(111.269,51.94) C8C.1@111.269,52.571 ; v1(111.395,15.381) 111.397,15.383 111.397,16.029 C8B.1@111.4,16.031 ; v1(111.4,3.9) C8A.1@111.4,4.531 ; v1(112.494,68.425) C17D.1@112.494,69.087 ; v1(112.494,79.929) C17E.1@112.494,80.472 ; v1(112.494,91.429) C17F.1@112.494,91.972 ; v1(112.559,56.592) C17C.1@112.559,57.139 ; v1(112.69,8.556) C17A.1@112.69,9.099 ; v1(112.69,20.056) C17B.1@112.69,20.599 ; v1(115.825,74) 115.825,73.995 116.033,73.787 116.033,73.575 C20D.1@116.144,73.464 ; v1(116.054,63.601) C135D.1@116.054,64.129 ; C135E.1@116.054,75.513 116.173,75.394 116.173,75.227 v1(116.425,74.975) ; v1(116.054,86.486) C135F.1@116.054,87.013 ; v1(116.119,51.653) C135C.1@116.119,52.18 ; C20E.1@116.144,84.849 v1(116.144,85.392) ; C20F.1@116.144,96.349 v1(116.144,96.892) ; C20C.1@116.209,61.516 v1(116.209,62.059) ; v1(116.25,3.613) C135A.1@116.25,4.141 ; v1(116.25,15.113) C135B.1@116.25,15.641 ; C20A.1@116.34,13.476 v1(116.34,14.019) ; C20B.1@116.34,24.976 v1(116.34,25.518) ; v1(117.75,75.025) 118.119,75.394 118.143,75.394 C18E.1@118.263,75.513 ; C19D.1@118.243,73.489 118.243,74.019 v1(118.256,74.032) ; C19E.1@118.243,84.874 118.243,85.404 v1(118.256,85.417) ; C19F.1@118.243,96.374 118.243,96.904 v1(118.256,96.917) ; v1(118.263,63.613) C18D.1@118.263,64.129 ; v1(118.263,86.498) C18F.1@118.263,87.013 ; C19C.1@118.308,61.541 118.308,62.071 v1(118.321,62.084) ; v1(118.328,51.665) C18C.1@118.328,52.18 ; C19A.1@118.439,13.501 118.439,14.031 v1(118.452,14.044) ; C19B.1@118.439,25.001 118.538,25.1 118.538,25.64 v1(118.542,25.644) ; C18A.1@118.459,4.141 118.477,4.122 118.477,3.607 v1(118.481,3.603) ; v1(118.459,15.125) C18B.1@118.459,15.641 ; v1(122.225,64.375) 122.23,64.375 122.38,64.525 122.712,64.525 122.799,64.611 C136D.1@122.799,64.644 ; v1(122.25,15.85) 122.255,15.85 122.458,16.052 122.909,16.052 122.995,16.139 C136B.1@122.995,16.156 ; C137D.1@122.799,72.682 123.329,72.682 v1(123.341,72.669) ; C136E.1@122.799,76.029 122.918,75.91 123.335,75.91 123.42,75.825 v1(123.425,75.825) ; C136F.1@122.799,87.529 122.918,87.41 123.102,87.41 123.258,87.254 123.396,87.254 v1(123.4,87.25) ; C137F.1@122.799,95.567 123.329,95.567 v1(123.341,95.554) ; C137E.1@122.808,84.058 122.811,84.058 122.951,84.199 122.951,84.202 123.085,84.335 123.085,84.909 v1(123.088,84.912) ; C136C.1@122.864,52.696 122.983,52.577 123.343,52.577 123.495,52.425 v1(123.5,52.425) ; C137C.1@122.864,60.734 123.394,60.734 v1(123.406,60.721) ; C136A.1@122.995,4.656 123.156,4.496 v1(123.546,4.496) ; C137A.1@122.995,12.694 123.525,12.694 v1(123.537,12.681) ; C137B.1@122.995,24.194 123.127,24.326 123.546,24.326 123.595,24.375 v1(123.6,24.375) ; v1(125.351,68.362) C16D.1@125.351,68.904 ; v1(125.351,79.747) C16E.1@125.351,80.289 ; v1(125.351,91.247) C16F.1@125.351,91.789 ; v1(125.416,56.414) C16C.1@125.416,56.956 ; v1(125.548,8.374) C16A.1@125.548,8.916 ; v1(125.548,19.874) C16B.1@125.548,20.416 ; v1(128.727,63.627) 128.731,63.631 128.731,64.133 C140D.1@128.741,64.143 ; v1(128.729,86.486) 128.741,86.498 C140F.1@128.741,87.028 ; C140E.1@128.741,75.528 128.87,75.399 129.12,75.399 129.32,75.2 v1(129.325,75.2) ; v1(128.794,51.653) 128.806,51.665 C140C.1@128.806,52.195 ; C9D.1@128.854,73.452 v1(128.854,73.994) ; C9E.1@128.854,84.837 v1(128.854,85.379) ; C9F.1@128.854,96.337 v1(128.854,96.879) ; C9C.1@128.919,61.504 v1(128.919,62.046) ; v1(128.925,15.113) 128.937,15.125 C140B.1@128.937,15.655 ; v1(128.928,3.616) 128.932,3.62 128.932,4.15 C140A.1@128.937,4.155 ; C9A.1@129.05,13.464 v1(129.05,14.006) ; C9B.1@129.05,24.964 v1(129.05,25.506) ; v1(130.575,75.1) 130.874,75.399 130.957,75.399 C13E.1@131.077,75.519 C13E.1@131.077,75.528 ; C12D.1@131.04,73.464 131.04,73.994 v1(131.052,74.007) ; C12E.1@131.04,84.849 131.04,85.379 v1(131.052,85.392) ; C12F.1@131.04,96.349 131.04,96.879 v1(131.052,96.892) ; v1(131.077,63.601) C13D.1@131.077,64.134 C13D.1@131.077,64.143 ; v1(131.077,86.486) C13F.1@131.077,87.019 C13F.1@131.077,87.028 ; C12C.1@131.105,61.516 131.105,62.046 v1(131.117,62.059) ; v1(131.142,51.653) C13C.1@131.142,52.186 C13C.1@131.142,52.195 ; C12A.1@131.236,13.476 131.236,14.006 v1(131.248,14.019) ; C12B.1@131.236,24.976 131.236,25.506 v1(131.248,25.519) ; v1(131.273,3.613) C13A.1@131.273,4.146 C13A.1@131.273,4.155 ; C13B.1@131.273,15.655 C13B.1@131.273,15.646 131.276,15.643 131.276,15.11 v1(131.279,15.106) ; v1(134.874,84.35) 134.879,84.35 135.03,84.199 135.605,84.199 C138E.1@135.727,84.077 ; C138D.1@135.737,72.682 136.267,72.682 v1(136.28,72.669) ; C138F.1@135.737,95.567 136.267,95.567 v1(136.28,95.554) ; C139D.1@135.749,64.894 135.765,64.911 136.288,64.911 v1(136.304,64.927) ; C139E.1@135.749,76.279 135.831,76.197 136.295,76.197 v1(136.299,76.194) ; C139F.1@135.749,87.779 135.765,87.796 136.288,87.796 v1(136.304,87.812) ; C138C.1@135.802,60.734 135.802,60.741 135.845,60.784 136.341,60.784 v1(136.345,60.788) ; C139C.1@135.814,52.946 135.83,52.963 136.353,52.963 v1(136.369,52.979) ; C138A.1@135.933,12.694 136.463,12.694 v1(136.476,12.681) ; C138B.1@135.933,24.194 135.933,24.283 135.977,24.326 136.421,24.326 136.458,24.363 v1(136.463,24.363) ; C139A.1@135.945,4.906 135.961,4.923 136.484,4.923 v1(136.5,4.939) ; C139B.1@135.945,16.406 136.064,16.287 136.644,16.287 136.685,16.247 v1(136.69,16.247) ; v1(176.49,5.125) D6.5@177.32,5.125 ; D5.5@177.384,9.284 v1(178.308,9.284) ; D6.2@180.02,5.125 v1(180.968,5.125) ; D5.2@180.084,9.284 v1(181.056,9.284) ; v1(183.337,74.727) 183.337,74.732 183.4,74.795 C131.1@183.4,75.494 ; v1(184.216,77.802) 184.216,77.797 184.316,77.697 184.316,77.299 184.325,77.289 C133.1@184.35,77.289 ; v1(185.536,73.45) 185.567,73.45 186.006,73.889 IC17.14@186.3,73.889 ; v1(185.925,5.725) 185.929,5.721 186.109,5.721 186.129,5.701 186.228,5.701 186.561,5.368 D4.2@186.811,5.368 ; v1(186.114,10.377) 186.119,10.377 186.196,10.301 186.831,10.301 D2.2@186.94,10.191 ; v1(186.3,71.25) C132.1@186.3,71.839 ; v1(186.75,80.664) C130.1@187.375,80.664 ; D4.5@189.511,5.368 v1(190.373,5.368) ; D2.5@189.64,10.191 v1(190.33,10.191) ; IC17.1@190.15,77.739 190.15,77.932 190.191,77.973 191.419,77.973 191.427,77.981 192.292,77.981 C134.1@192.3,77.989 192.282,78.007 192.282,78.482 v1(192.278,78.486) ; R244.1@190.275,80.684 v1(190.275,81.301) ; v1(32.364,11.836) v1(32.364,11.836) ; IC13.33@46.047,38.4 IC13.33@46.372,38.075 ; IC13.33@46.372,38.075 IC13.33@47.347,37.1 ; IC13.33@46.372,38.075 IC13.33@47.347,39.05
  Top Layer w0.5: R288.2@74.55,3.95 v2(75.575,3.95)
  Top Layer w0.508: IC2.7@18.539,40.456 18.546,40.462 v1(19.609,40.462) ; v1(29.566,47.828) 29.568,47.826 IC15.7@30.966,47.826 ; C30.1@39.673,33.227 39.944,33.498 39.944,34.151 40.553,34.76 R231.2@40.573,34.76 ; R235.2@47.732,32.187 47.752,32.167 v1(47.752,31.75) ; v1(62.535,63.957) IC14.4@62.535,64.817 ; v1(86.766,88.036) 86.766,87.536 C42.1@86.799,87.503
  Top Layer w0.762: R3.1@11.595,94.336 v2(12.471,94.336) ; C10.2@11.797,92.608 11.822,92.583 v2(12.675,92.583) ; C52.2@29.394,23.556 29.524,23.685 v2(29.524,25.019) ; v2(38.354,39.7) 39.289,39.7 C26.1@39.303,39.686 39.317,39.7 v2(40.234,39.7) 41.194,39.7 C22.1@41.208,39.686 ; v2(38.456,43.51) 39.519,43.51 C27.1@39.545,43.485 ; v2(38.837,31.191) 39.669,31.191 C28.1@39.673,31.195 ; v2(38.837,33.223) 39.669,33.223 C30.1@39.673,33.227 ; v2(38.837,41.173) 39.401,41.173 39.545,41.317 C29.1@39.545,41.481 ; v2(50.495,43.967) 50.495,43.776 51.066,43.205 C33.1@51.241,43.205 ; C34.1@51.368,33.381 51.41,33.339 v2(51.41,32.639) ; C36.1@53.273,33.381 53.448,33.381 53.592,33.237 53.592,33.062 53.645,33.009 v2(53.645,32.487) ; C32.1@53.273,43.205 53.34,43.272 v2(53.34,43.993) ; v2(60.325,37.16) 61.689,37.16 C101.2@61.715,37.134 61.838,37.134 62.357,36.615 v2(62.357,35.916)
  Bottom Layer w0.254: C75.1@70.415,46.334 70.598,46.151 70.908,46.151 71.075,45.984 v1(71.115,45.984) ; C96.1@79.865,50.684 79.865,50.074 79.915,50.024 v1(79.915,49.984) ; v1(80.715,49.275) 80.743,49.247 81.187,49.247 81.332,49.102 81.332,48.817 C54.1@81.515,48.634
  Bottom Layer w0.3: J9.6@-1.435,13.75 -1.2,13.75 -0.6,13.15 v1(-0.6,12.3) ; J9.10@-1.435,24.05 -1.435,25.165 v1(-1,25.6) ; J9.5@2.89,20.2 4.165,20.2 4.765,20.8 J9.9@4.765,21.1 ; D16.2@68.475,94.275 v2(69.525,94.275) ; v1(79.915,47.584) 79.929,47.598 79.929,47.828 C60.1@79.942,47.841 ; D14.2@89.325,89.95 v1(90.425,89.95) ; v1(94.575,90.85) D13.2@95.4,90.85
  Bottom Layer w0.35: v1@72.71,38.81 72.757,38.81 73.162,39.215 73.162,39.219 73.177,39.234 ; C61.1@78.375,39.524 78.51,39.389 78.861,39.389 79.125,39.125 v1(79.125,38.8)
  Bottom Layer w0.381: v1(14.732,8.128) R55.2@15.405,8.128 ; D3.2@19.685,19.095 v1(19.685,19.812) ; v1(70.358,39.624) 70.363,39.624 70.505,39.766 70.966,39.766 C51.1@70.975,39.775 ; C77.1@70.736,41.094 70.736,41.119 70.746,41.129 70.771,41.129 70.822,41.18 71.111,41.18 v1(71.115,41.184) ; C95.1@70.77,49.217 70.77,49.197 70.779,49.188 71.111,49.188 v1(71.115,49.184) ; v1(71.115,47.688) v1(71.115,48.384) ; v1(71.915,49.184) v1(72.715,49.184) v1(73.515,49.184) v1(74.315,49.184) v1(75.115,49.184) 75.582,49.184 75.604,49.206 C69.1@75.805,49.206 ; v1(72.715,41.184) v1(73.515,41.184) v1(74.315,41.184) v1(75.115,41.184) v1(76.715,41.184) v1(77.515,41.184) v1(78.315,41.184) v1(79.115,41.184) ; v1(72.715,41.984) v1(72.715,42.784) v1(72.715,43.584) v1(72.715,44.384) v1(72.715,45.984) v1(72.715,46.784) v1(72.715,47.584) v1(72.715,48.384) ; 73.177,39.234 73.177,39.378 C48.1@73.45,39.65 ; v1(74.315,42.784) v1(75.115,42.784) 75.469,42.784 75.48,42.772 75.505,42.772 75.515,42.763 C123.1@75.515,42.738 76.663,42.738 76.71,42.784 v1(76.715,42.784) v1(77.515,42.784) v1(78.315,42.784) v1(78.315,43.584) v1(78.315,44.384) ; v1(74.315,47.584) v1(75.115,47.584) 75.461,47.584 75.471,47.594 75.496,47.594 C115.1@75.505,47.604 ; C115.1@75.505,47.629 C115.1@75.505,47.604 ; C118.1@76.306,47.542 76.253,47.594 75.515,47.594 C115.1@75.505,47.604 ; v1(76.715,47.584) v1(77.515,47.584) v1(78.315,47.584) v1(78.315,46.784) v1(78.315,45.984) 78.315,45.979 78.301,45.965 78.301,45.318 C105.1@78.181,45.199 ; v1(76.715,49.184) v1(77.515,49.184) v1(78.315,49.184) v1(79.115,49.184) ; v1@78.314,44.398 C105.1@78.314,45.045 ; v1(79.915,41.184) 79.915,41.189 79.965,41.24 79.965,41.515 79.975,41.525 79.919,41.581 v1@79.919,41.98 ; v1(79.915,41.984) v1(79.915,42.784) v1(79.915,43.584) ; v1(79.915,44.384) 79.919,44.388 79.919,44.677 79.94,44.699 79.94,44.724 79.95,44.734 C58.1@79.975,44.734 ; v1(79.915,46.784) v1(79.915,45.984) 79.915,45.979 79.975,45.919 79.975,45.69 80.198,45.467 81.447,45.467 C47.1@81.515,45.534 ; v1(79.915,48.384) v1(79.915,49.184) ; C65.1@80.64,39.778 80.65,39.787 C65.1@80.675,39.787 80.7,39.787 80.709,39.797 80.709,40.373 80.715,40.379 v1(80.715,40.384) 80.72,40.384 80.751,40.354 81.295,40.354 C53.1@81.415,40.234 ; v1(81.415,43.926) 81.419,43.922 81.419,43.33 C62.1@81.515,43.234 ; v1(101.622,46.491) OSC1.2@102.893,47.762 ; v1(102.893,46.478) OSC1.2@102.893,47.762 ; v1(104.162,46.493) OSC1.2@102.893,47.762
  Bottom Layer w0.762: J7.L4@1.46,12.095 1.642,12.278 1.642,12.888 2.45,13.695 J9.7@2.8,13.695 ; J7.L2@1.46,25.695 1.642,25.513 1.642,24.903 2.45,24.095 J9.11@2.8,24.095 ; J9.8@4.9,16.545 4.9,16.065 5.134,15.831 6.369,15.831 v2(6.4,15.8) ; J9.9@4.955,21.3 v2(6.2,21.3)
  other v1: 103.3,6.8 103.275,7.65 102.7,9.65 200.9,10 199.25,10.425 201.2,10.975 201.025,12.275 103.875,14.425 73.575,22.225 74.825,22.275 185.434,22.509 101.3,22.95 83.125,23.625 101.275,24.05 81.775,24.175 95.625,24.35 94.025,24.65 199.2,25.625 74.5,26.25 75.85,26.525 199.25,26.65 199.3,27.175 72.4,27.625 73.45,27.625 200.65,27.725 70.1,28.05 89.25,29.075 70.1,29.7 91,29.7 89.725,30.525 89.15,30.575 190,41.85 197.075,42.125 190,43 197.05,43.125 96.65,46.5 98.95,49.825 97.45,49.975 94.45,53.7 91.525,53.95 95.25,54.55 92.3,54.75 89.85,57.025 81.725,57.6 89.95,58.1 83.05,58.375 92.2,60.075 74.825,60.525 90.675,60.575 81.7,60.625 80.5,60.725 67.8,61.475 69.275,61.525 79.175,61.55 78.025,61.575 74.975,62.175 91.8,62.575 94.275,62.575 93.4,62.6 70.3,63.275 71.4,63.3 83.575,63.35 81.4,63.6 94.3,63.625 80.05,64.225 83.6,64.45 79.85,66.9 81.475,66.9 79.575,68 78.725,68.9 69.45,69.1 198.675,69.1 160.1,69.225 161.7,69.225 198.725,70.175 69.525,71.025 197.375,71.05 200.15,72.15 197.35,72.2 201.6,72.675 198.925,73.825 197.375,73.925 165.925,74.25 165.9,75.375 201.675,75.975 200.375,76.1 200.35,81.2 195.575,82.8 193.8,82.975 194.775,84.175 194.775,85.15 189.55,85.175 189.6,86.15 195.875,87.075 195.875,88.1 196.75,90.2 196.75,91.25 198.975,91.7 200.425,92.325 188.675,93.15 199.4,93.475 197.775,93.5 188.675,94.225 198.475,95.975 198.5,97
  other v2: 60.3,45.7 63.1,45.7 60.3,46.8 63.1,46.8 60.3,52 63.1,52 60.3,53.1 63.1,53.1
  other v3: 116.811,7.544 118.385,7.544 119.96,7.544 129.472,7.586 131.047,7.586 132.622,7.586 129.587,9.627 131.162,9.627 132.575,9.625 116.76,9.855 118.335,9.855 119.909,9.855 32.703,15.961 33.903,15.961 32.703,17.161 33.903,17.161 129.46,19.228 131.035,19.228 132.609,19.228 116.506,19.558 118.081,19.558 119.655,19.558 129.483,21.341 131.058,21.341 132.632,21.341 118.131,21.597 116.582,21.641 119.605,21.641 45.372,37.077 47.445,37.077 46.364,38.077 45.372,38.977 47.445,38.977 116.531,55.347 118.106,55.347 119.681,55.347 129.282,55.88 130.857,55.88 132.432,55.88 129.282,57.684 130.857,57.684 132.432,57.684 116.455,57.938 118.03,57.938 119.605,57.938 129.384,68.098 130.984,68.098 132.457,68.098 118.034,68.224 119.655,68.225 116.459,68.301 129.333,69.85 130.984,69.876 132.406,69.876 116.48,69.977 118.055,69.977 119.63,69.977 187.412,74.2 188.582,74.2 189.751,74.2 187.412,75.395 188.582,75.395 189.751,75.395 187.412,76.589 188.582,76.589 189.751,76.589 116.557,79.274 118.131,79.274 119.706,79.274 129.231,79.299 130.806,79.299 132.381,79.299 129.257,81.108 130.831,81.108 132.406,81.108 116.455,81.179 118.03,81.179 119.605,81.179 116.531,90.627 118.106,90.627 119.681,90.627 129.409,90.678 130.984,90.678 132.559,90.678 129.409,92.786 130.984,92.786 132.559,92.786 116.531,93.294 118.106,93.294 119.681,93.294
I2C1_SCL: IC1.6 IC9.139 IC18.3 R35.1 TP2.1 | length 64.5
  Top Layer w0.127: IC1.6@33.9,38.715 32.985,38.715 32.225,39.475 32.225,41.475 32.85,42.1 33.652,42.1 39.05,47.498 v1(44.323,47.498) ; TP2.1@41.48,82.477 41.774,82.183 41.774,81.726 v1(42.5,81) 44.175,82.675 IC18.3@46.1,82.675 ; IC9.139@43.935,53.521 43.935,52.378 44.178,52.136 44.178,52.116 R35.1@44.404,51.889 ; R35.1@44.424,51.889 R35.1@44.404,51.889 ; v1(44.5,50.1) 44.451,50.149 44.251,50.149 43.924,50.477 43.924,51.389 44.178,51.643 44.178,51.663 R35.1@44.404,51.889
  Bottom Layer w0.127: v1(42.5,81) 42.5,78.5 41.792,77.793 41.792,77.054 41.7,76.962 41.7,75.659 43.055,74.304 43.066,74.304 43.443,73.927 43.443,73.916 43.454,73.905 43.454,73.404 43.4,73.35 43.4,72.969 43,72.569 43,68.653 43.495,68.158 43.495,55.604 43.425,55.534 43.425,55.21 43.495,55.14 43.495,55.054 43.9,54.649 43.9,51.4 44.5,50.8 v1(44.5,50.1) 44.5,47.709 44.323,47.532 v1(44.323,47.498)
I2C1_SDA: IC1.5 IC9.137 IC18.4 R12.1 TP1.1 | length 65.6
  Top Layer w0.127: IC1.5@33.9,37.445 35.245,37.445 36.49,38.69 36.49,40.437 36.475,40.452 36.475,40.998 36.49,41.013 36.49,44.14 37.571,45.221 v1(42.917,45.221) ; TP1.1@41.475,85.275 40.425,84.225 40.425,81.175 v1(42.1,79.5) 44.625,82.025 IC18.4@46.1,82.025 ; IC9.137@42.935,53.521 v1(42.935,54.702)
  Bottom Layer w0.127: v1(42.1,79.5) 42.1,78.9 41,77.8 41,75.2 42.15,74.05 42.961,74.05 43.189,73.822 43.189,73.498 42.926,73.235 42.926,72.854 42.5,72.428 42.5,58.326 42.731,58.094 42.731,57.334 42.851,57.215 42.851,56.406 42.597,56.152 42.597,56.132 42.371,55.906 R12.1@42.351,55.906 42.351,55.287 v1(42.935,54.702) 42.935,50.13 42.958,50.108 42.958,47.277 42.935,47.255 42.935,45.24 v1(42.917,45.221)
IO0: IC6.AE26 R17.2 | length 4.6
  Top Layer w0.137: R17.2@64.158,32.044 64.158,33.283 65.1,34.225 65.756,34.225 IC6.AE26@66.715,35.184